# Altium PCB hat_template 2021V3.PcbDoc (part 2 of 2)
Units mil, origin at the board's own origin, x right, y up, seen from the top; angles counter-clockwise.
Board outline 2519.68 x 3346.46 mil, 4 copper layers (Top Side, Ground Plane, Power Plane, Bottom Side), stack 33.234 mil thick; 110 components, 73 nets, 370 pads, 68 vias.
Unrouted connection lines stored in the file: 141.
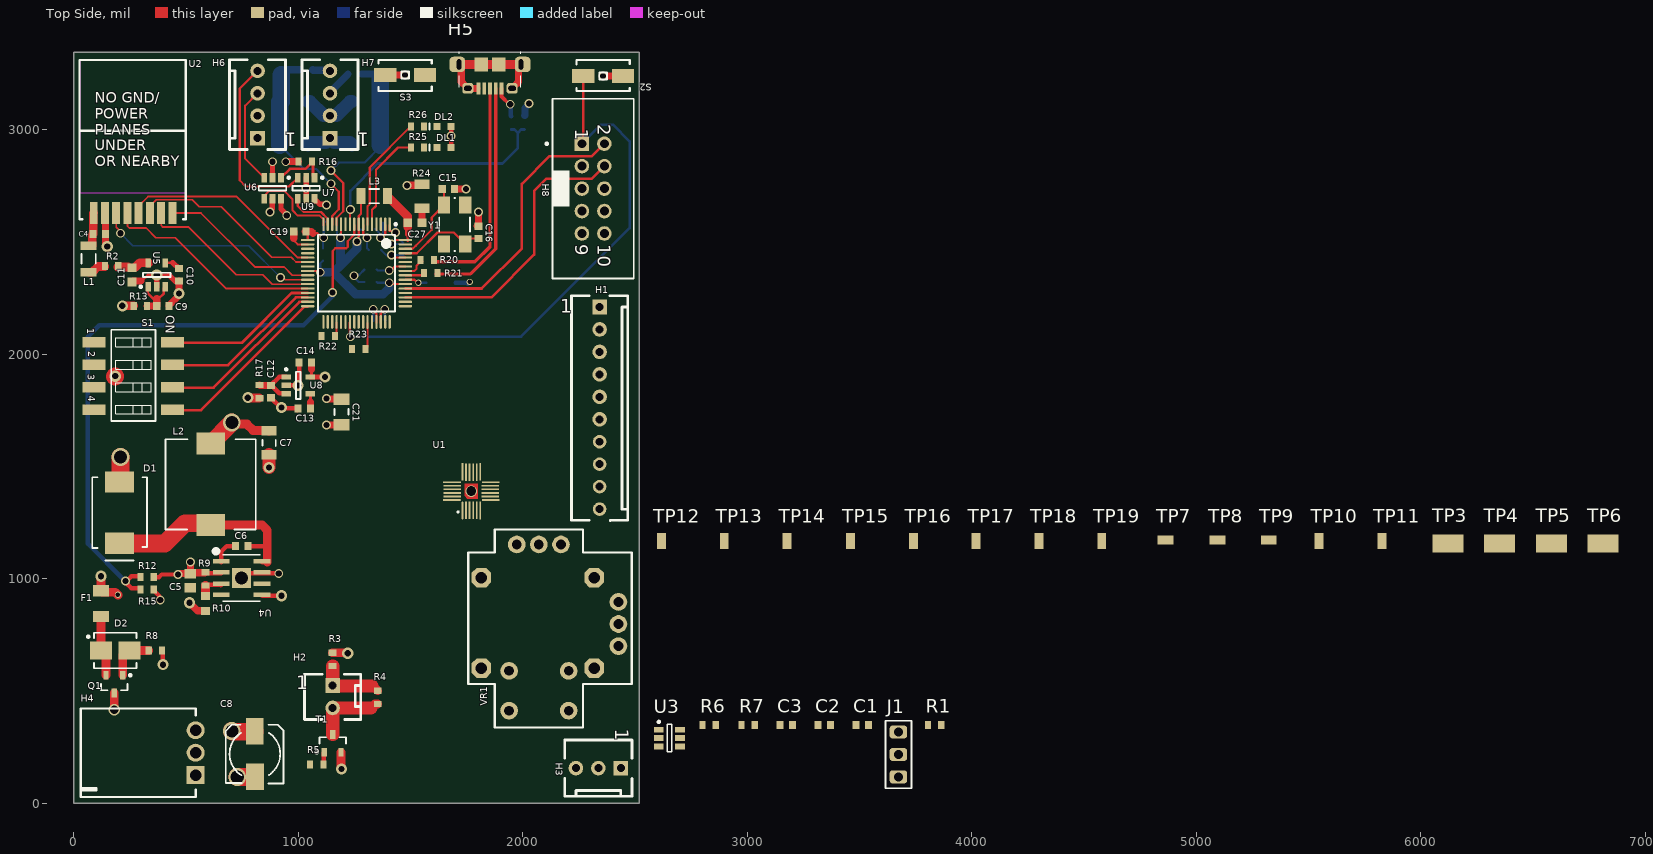
[diagram p0: Top Side view]

## Via types
v1: diameter 39.37, hole 27.56, Top Side to Bottom Side, 42 vias
v2: diameter 49.21, hole 27.56, Top Side to Bottom Side, 9 vias
v3: diameter 50, hole 27.56, Top Side to Bottom Side, 7 vias
v4: diameter 78.74, hole 59.06, Top Side to Bottom Side, 5 vias
v5: diameter 27.56, hole 19.68, Top Side to Bottom Side, 3 vias
v6: diameter 50, hole 39.37, Top Side to Bottom Side, 1 vias
v7: diameter 51.18, hole 43.31, Top Side to Bottom Side, 1 vias

## Nets (pads, with @x,y where several pads share a name; then routed paths per layer and width w, separated by ;. In a path a pad name is that pad's centre, name@x,y a point inside that pad or via, vN(x,y) a via of type N, cw(c..) or ccw(c..) an arc to the next point about the centre after c; other vN are vias at no path point) (continued)
"VBATT Detection": (continued)
  Top Side w9.84: v1(1153.54,2275.59) 1153.54,2460.63 1165.35,2472.44 1214.71,2472.44 1220.47,2478.21 1220.47,2504.11 1250,2533.64 U9.9@1250,2575.79
  Top Side w19.68: R15.2 297.24,955.3 293.31,959.24 255.91,959.24 230.31,984.83 v1(230.31,990.16) 235.64,990.16 257.3,1011.81 293.31,1011.81 R12.1
  Bottom Side w19.68: v1(230.31,990.16) 62.99,1157.48 62.99,2078.74 114.17,2129.92 1023.62,2129.92 1153.54,2259.84 v1(1153.54,2275.59)
VBUS: H5.1 R11.2 TP9.1 | length 144.8
  Top Side w15.75: H5.1 1905.51,3148.62 1939.96,3114.17 v1(1944.88,3114.17)
  Bottom Side w19.68: v1(1944.88,3114.17) 1946.85,3112.2 1946.85,3062.99 R11.2
pads on no net: H1.5 H1.6 H1.8 H5.4 H8.3 H8.9 H8.10 U1.2 U1.3 U1.4 U1.5 U1.6 U1.7 U1.12 U1.14 U1.15 U1.16 U1.17 U1.19 U1.21 U4.4 U4.6 U9.11 U9.19 U9.20 U9.23 U9.33 U9.35 U9.37 U9.38 U9.40 U9.41 U9.42 U9.44 U9.49 U9.50 U9.52 U9.59 U9.63 VR1.7 VR1.8 VR1.9 VR1.10 VR1.11 VR1.12 VR1.13 VR1.14 Y1.2 Y1.4
copper on no net: | length 2283
  Top Side w19.68: 356.3,1007.87 379.92,1007.87 391.73,1019.68 v1(464.57,1019.68) ; 586.61,970.47 591.14,975 657.03,975 654.47,972.44 ; 586.61,1029.53 591.14,1025 657.03,1025 ; 657.03,1075 657.32,1075 657.48,1075.16 657.48,1122.05 681.1,1145.67 720.47,1145.67 ; 748.03,1000 773.03,1025 811.87,1025 811.87,1024.84 812.03,1025 839.03,1025 839.19,1024.84 912.17,1024.84 v1(913.39,1023.62) ; 775.59,1145.67 814.96,1145.67 846.46,1145.67 ; 839.03,1075 862.05,1075 862.2,1074.84
  Top Side w31.5: v1(464.57,1019.68) 468.5,1023.62 519.68,1023.62 ; v1(519.68,1074.8) 519.68,1023.62 ; 584.65,1027.56 523.62,1027.56 519.68,1023.62 ; 1716.54,3291.34 1726.45,3281.42 1726.45,3214.49 1747.05,3193.9 1747.05,3192.91 1754.92,3185.04 1755.91,3185.04 1795.28,3185.04 ; 1952.76,3185.04 1953.74,3185.04 1961.61,3192.91 1961.61,3193.9 1982.21,3214.49 1982.21,3281.42 1992.13,3291.34
  Top Side w39.37: 586.61,927.17 586.61,970.47 ; 610.24,1248.03 618.11,1240.16 839.14,1240.16 862.2,1217.1 862.2,1145.67 862.2,1074.84 ; 1716.54,3291.34 1814.96,3291.34 1893.7,3291.34 1992.13,3291.34
  Top Side w78.74: v3@183.86,1901.97 v3(185.04,1903.15) ; 204.72,1157.48 405.51,1157.48 496.06,1248.03 610.24,1248.03
  other v7: 1771.37,1391.15

## Polygon pours and split planes (outlines as drawn)
no net on Ground Plane (split plane): 2499.59,20.1 20.1,20.1 20.1,2712.6 645.67,2712.6 645.67,3326.36 2499.59,3326.36
no net on Power Plane (split plane): 2499.59,20.1 20.1,20.1 20.1,1069.71 417.32,1069.71 419.27,1070.09 420.93,1071.2 490.3,1140.57 678.99,1140.57 739,1080.57 739,939.12 509.84,709.97 330.38,889.43 328.72,890.54 326.77,890.92 307.09,890.92 305.14,890.54 303.48,889.43 302.38,887.78 301.99,885.83 302.38,883.88 303.48,882.22 305.14,881.12 307.09,880.73 324.66,880.73 503.08,702.31 502.78,700.79 503.16,698.84 504.27,697.18 505.92,696.08 507.87,695.69 509.4,695.99 807.42,397.97 846.79,358.6 848.44,357.49 850.39,357.11 852.34,357.49 854,358.6 855.1,360.25 855.49,362.2 855.1,364.16 854,365.81 814.63,405.18 517.05,702.76 747.7,933.4 748.8,935.06 749.19,937.01 749.19,1082.68 748.8,1084.63 747.7,1086.28 684.71,1149.27 683.05,1150.38 681.1,1150.77 488.19,1150.77 486.24,1150.38 484.58,1149.27 415.21,1079.9 20.1,1079.9 20.1,2270.49 106.3,2270.49 108.25,2270.88 109.9,2271.99 183.21,2345.3 488.19,2345.3 490.14,2345.68 491.79,2346.79 645.34,2500.33 646.44,2501.99 646.83,2503.94 646.44,2505.89 645.34,2507.54 643.68,2508.65 641.73,2509.03 641.73,2716.54 641.73,3326.36 2499.59,3326.36

## Other copper
Ground Plane (plane layer: these items are gaps in the copper):
  pour cut-out: 7.87,3342.52 7.87,2712.6 645.67,2712.6 645.67,3342.52
Power Plane (plane layer: these items are gaps in the copper):
  pour cut-out: 7.87,3342.52 7.87,2716.54 641.73,2716.54 641.73,3342.52
  pour cut-out: 7.87,2732.28 7.87,2275.59 106.3,2275.59 181.1,2350.39 488.19,2350.39 641.73,2503.94 641.73,2732.28
  lines w10: 7.87,1074.8 417.32,1074.8 488.19,1145.67 681.1,1145.67 744.09,1082.68 744.09,937.01 507.87,700.79 ; 7.87,2275.59 106.3,2275.59 181.1,2350.39 488.19,2350.39 641.73,2503.94 ; 307.09,885.83 326.77,885.83 811.02,401.57 850.39,362.2 ; 980.32,3287.4 980.32,2803.15 921.26,2744.09 921.26,2062.99 1003.94,1980.31 1003.94,1503.94 1149.61,1358.27 1334.65,1358.27 2055.12,637.8 2137.8,637.8

## Text inside footprints (layer, text, board x,y; h text height)
H1: Top Overlay "1" at 2167.52,2186.02 h60
H2: Top Overlay "1" at 991.08,508.88 h60
H3: Top Overlay "1" at 2412.01,332.48 h60 r270
H5: Mechanical 1 "PCB Edge" at 1938.98,3380.71 h20.63 r180
H6: Top Overlay "1" at 993.9,2987.99 h60 r180
H7: Top Overlay "1" at 1316.73,2987.99 h60 r180
H8: Top Overlay "9" at 2234.25,2491.34 h59.06 r270; Top Overlay "10" at 2334.25,2491.34 h59.06 r270; Top Overlay "1" at 2234.25,3005.5 h59.06 r270; Top Overlay "2" at 2334.25,3025.19 h59.06 r270
S1: Top Overlay "4" at 63.98,1815.16 h31.5 r270; Top Overlay "3" at 62.99,1912.6 h31.5 r270; Top Overlay "2" at 64.96,2014.96 h31.5 r270; Top Overlay "1" at 61.02,2117.32 h31.5 r270; Top Overlay "ON" at 410.55,2174.33 h39.37 r270
U2: Top Overlay "NO GND/ / POWER / PLANES / UNDER / OR NEARBY" at 93.36,2837.6 h47.24
U4: Mechanical 13 "*" at 672.03,1049.44 h50